# Altium PCB Dragonflyte.PcbDoc (part 3 of 3)
Units mil, origin at the board's own origin, x right, y up, seen from the top; angles counter-clockwise.
Board outline 1814.93 x 2125 mil, 6 copper layers (Component Side, Ground Plane (GND), Inner Layer 1, Inner Layer 2, Power Plane (VCC), Solder Side), stack 62.6 mil thick; 147 components, 158 nets, 1045 pads, 352 vias.
Unrouted connection lines stored in the file: 306.
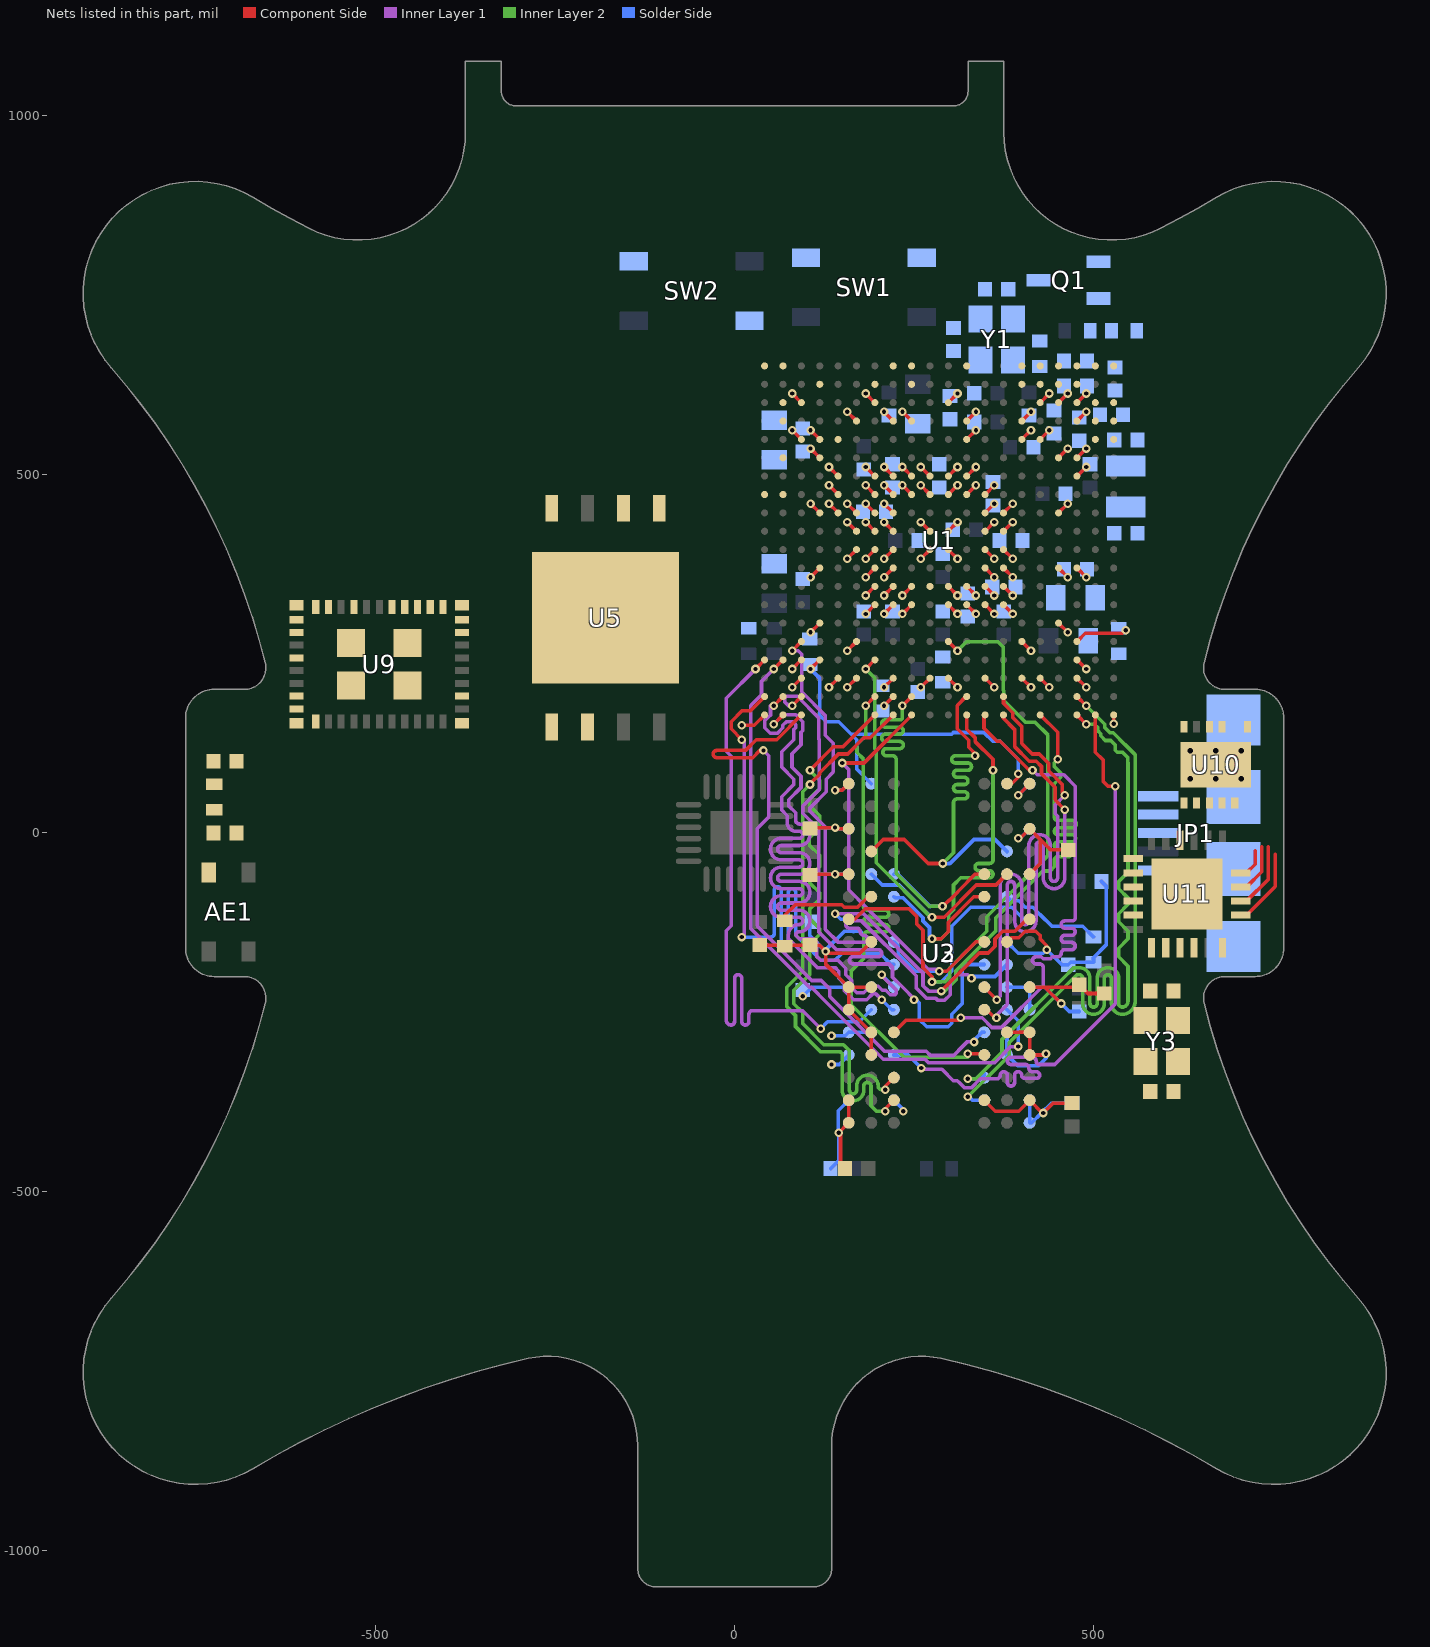
[diagram p7: the nets of this part, all layers, seen from the top]

## Via types
v1: diameter 12, hole 6, Component Side to Solder Side, tented both sides, 330 vias
v2: diameter 19.68, hole 7.87, Component Side to Solder Side, 12 vias
v3: diameter 12, hole 6, Component Side to Solder Side, 5 vias
v4: diameter 19.68, hole 11.81, Component Side to Solder Side, 5 vias

## Nets (pads, with @x,y where several pads share a name; then routed paths per layer and width w, separated by ;. In a path a pad name is that pad's centre, name@x,y a point inside that pad or via, vN(x,y) a via of type N, cw(c..) or ccw(c..) an arc to the next point about the centre after c; other vN are vias at no path point) (continued)
DRAM_D27: U1.C2 U3.H7 | length 884.8
  Component Side w5: v1(80.1,177.18) U1.C2@92.89,189.98
  Inner Layer 1 w5: v1@79.82,177.5 74.82,177.5 69.82,182.5 69.82,187.5 72.6,190.27 87.05,190.27 117.32,160 117.32,130.36 117.5,130.18 117.5,60.18 94.82,37.5 94.82,27.5 117.32,5 117.32,-138.08 141.74,-162.5 199.82,-162.5 cw(c199.82,-167.5) 204.82,-167.5 cw(c199.82,-167.5) 199.82,-172.5 164.82,-172.5 ccw(c164.82,-177.5) 159.82,-177.5 ccw(c164.82,-177.5) 164.82,-182.5 214.82,-182.5 219.82,-187.5 219.82,-200.99 235.29,-216.45 235.55,-216.45 249.82,-230.72 v1(249.82,-232.5)
  Solder Side w5: v1(249.82,-232.5) 252.5,-232.5 257.32,-237.32 257.32,-260 267.32,-270 297.32,-270 302.32,-265 302.32,-252.32 317.05,-237.6 317.05,-190.28 324.07,-183.25 U3.H7@347.81,-183.25
DRAM_D28: U1.A2 U3.H3 | length 896.7
  Component Side w5: v1(10,130) -5,145 -5,155 10,170 21.73,170 U1.A2@41.71,189.98
  Inner Layer 1 w5: v1(10,-145) 13.32,-141.68 13.32,126.68 v1(10,130)
  Solder Side w5: v1(10,-145) 50,-145 ccw(c50,-140) 55,-140 55,-80 cw(c60,-80) 60,-75 cw(c60,-79.82) 64.82,-79.82 64.82,-156 ccw(c69.82,-156) 69.82,-161 ccw(c69.82,-156) 74.82,-156 74.82,-82.5 cw(c79.82,-82.5) 79.82,-77.5 cw(c79.82,-82.5) 84.82,-82.5 84.82,-142.5 119.82,-177.5 139.82,-177.5 149.82,-167.5 202.09,-167.5 217.84,-183.25 U3.H3@221.83,-183.25
DRAM_D29: U1.C5 U3.H8 | length 886
  Component Side w5: v1(80.1,253.96) U1.C5@92.89,266.75
  Inner Layer 1 w5: v1(80.1,253.96) 88.37,253.96 93.19,249.13 93.19,196.86 126.32,163.73 126.32,136 137.32,125 137.32,85 127.32,75 127.32,57.27 104.82,34.77 104.82,30.23 126.32,8.73 126.32,-134.35 144.47,-152.5 179.82,-152.5 ccw(c179.82,-147.5) 184.82,-147.5 ccw(c179.82,-147.5) 179.82,-142.5 cw(c179.82,-137.5) 174.82,-137.5 ccw(c169.82,-137.5) 169.82,-132.5 159.82,-132.5 cw(c159.82,-127.5) 154.82,-127.5 cw(c159.82,-127.5) 159.82,-122.5 176.69,-122.5 244.32,-190.13 252.96,-198.78 252.96,-216.05 266.92,-230 279.64,-230 282.37,-232.73 292.73,-232.73 300.05,-225.41 300.05,-207.27 309.82,-197.5 324.82,-197.5 v1(329.82,-202.5)
  Solder Side w5: v1(329.82,-202.5) 332.35,-199.98 362.58,-199.98 U3.H8@379.31,-183.25
DRAM_D30: U1.B4 U3.F8 | length 909.9
  Component Side w5: v1(54.51,228.37) U1.B4@67.3,241.16
  Inner Layer 1 w5: v1(54.51,228.37) 37.32,211.18 37.32,192.32 22.5,177.5 22.5,10.23 22.32,10.05 22.32,-133.18 104.14,-215 106.86,-215 126.86,-235 206.87,-315 265,-315 270,-320 362.14,-320 384.64,-297.5 v1(394.82,-297.5)
  Solder Side w5: U3.F8@379.31,-246.24 394.82,-261.75 v1(394.82,-297.5)
DRAM_D31: U1.A4 U3.F2 | length 904.4
  Component Side w5: v1(28.92,228.37) U1.A4@41.71,241.16
  Inner Layer 1 w5: 0,-249.32 -0.18,-249.5 ; v1(28.92,228.37) -11.68,187.77 -11.68,113.95 -4.68,106.95 -4.68,-129.27 -11.68,-136.27 -11.68,-261 ccw(c-5.18,-261) -5.18,-267.5 ccw(c-5.18,-262.5) -0.18,-262.5 -0.18,-249.5 ; v1(119.82,-272.5) 94.82,-247.5 24.82,-247.5 ccw(c24.82,-252.5) 19.82,-252.5 19.82,-262.5 cw(c14.82,-262.5) 14.82,-267.5 cw(c14.82,-262.5) 9.82,-262.5 9.82,-202.5 ccw(c4.82,-202.5) 4.82,-197.5 ccw(c4.82,-202.5) 0,-201.18 ccw(c4.82,-202.5) -0.18,-202.5 -0.18,-249.5
  Solder Side w5: v1(119.82,-272.5) 129.35,-262.97 173.61,-262.97 U3.F2@190.33,-246.24
DRAM_DQM0: U1.N1 U2.E7 | length 829.4
  Component Side w5: U2.E7@221.83,-277.74 238.57,-261 311.32,-261 v1(314.82,-257.5) ; U1.N1@348.8,164.39 347.32,164.39 347.32,145.86 365.39,127.79 369.88,127.79 410.18,87.5 v1(414.82,87.5)
  Inner Layer 1 w5: v1(314.82,-257.5) 344.66,-257.5 358.16,-271 371.76,-271 429.82,-212.93 429.82,-187.5 ccw(c424.82,-187.5) 424.82,-182.5 419.82,-182.5 cw(c419.82,-177.5) 414.82,-177.5 cw(c419.82,-177.5) 419.82,-172.5 427.14,-172.5 429.64,-175 440,-175 442.5,-172.5 449.82,-172.5 ccw(c449.82,-167.5) 454.82,-167.5 cw(c459.82,-167.5) 459.82,-162.5 469.32,-162.5 ccw(c469.32,-157.5) 474.32,-157.5 ccw(c469.32,-157.5) 469.32,-152.5 459.82,-152.5 cw(c459.82,-147.5) 454.82,-147.5 cw(c459.82,-147.5) 459.82,-142.5 469.32,-142.5 ccw(c469.32,-137.5) 474.32,-137.5 ccw(c469.32,-137.5) 469.32,-132.5 459.82,-132.5 cw(c459.82,-127.5) 454.82,-127.5 cw(c459.82,-127.5) 459.82,-122.5 469.82,-122.5 ccw(c469.82,-118) 474.32,-118 474.32,65.27 458.59,81 421.32,81 v1(414.82,87.5)
DRAM_DQM1: U1.G2 U2.D3 | length 804.6
  Component Side w5: v1(182.46,177.18) U1.G2@195.26,189.98 ; v1(324.82,-307.5) 345,-307.5 U2.D3@346.73,-309.23 ; U2.D3@342.46,-309.23 U2.D3@346.73,-309.23 ; U2.D3@347.81,-309.23 U2.D3@346.73,-309.23 ; U2.D3@349.82,-312.32 U2.D3@346.73,-309.23
  Inner Layer 2 w5: v1(182.46,177.18) 182.46,135.18 169.96,122.68 169.96,112.32 179.32,102.96 179.32,-102 ccw(c184.82,-102) 184.82,-107.5 209.82,-107.5 cw(c209.82,-112.5) 214.82,-112.5 cw(c209.82,-112.5) 209.82,-117.5 184.82,-117.5 ccw(c184.82,-122.5) 179.82,-122.5 ccw(c184.82,-122.5) 184.82,-127.5 209.82,-127.5 cw(c209.82,-132.5) 214.82,-132.5 cw(c209.82,-132.5) 209.82,-137.5 184.82,-137.5 ccw(c184.82,-142.5) 179.82,-142.5 179.82,-175.32 179.32,-175.32 162.32,-192.32 162.32,-239.09 235.73,-312.5 324.82,-312.5 v1@324.82,-310 ; v1(324.82,-307.5) v1@324.82,-310 ; v1@325,-310.18 v1@324.82,-310
DRAM_DQM2: U1.W1 U3.D3 | length 941.3
  Component Side w5: U1.W1@502.34,164.39 502.34,112.66 513.35,101.65 513.35,96.43 ; 513.32,86.59 513.32,96.41 ; 513.35,86.57 513.35,71.65 520,65 v1(530,65)
  Inner Layer 1 w5: v1(259.82,-327.5) 261.32,-329 288.64,-329 304.64,-345 310,-345 312.32,-347.32 319.64,-354.64 330,-354.64 342.15,-342.5 364.82,-342.5 ccw(c364.82,-337.5) 369.82,-337.5 cw(c374.82,-337.5) 374.82,-332.5 cw(c374.82,-337.5) 379.82,-337.5 379.82,-347.5 ccw(c384.82,-347.5) 384.82,-352.5 ccw(c384.82,-347.5) 389.82,-347.5 389.82,-337.5 cw(c394.82,-337.5) 394.82,-332.5 cw(c394.82,-337.5) 399.82,-337.5 ccw(c403.82,-337.5) 403.82,-341.5 420.82,-341.5 ccw(c420.82,-337.5) 424.82,-337.5 ccw(c419.82,-337.5) 419.82,-332.5 414.82,-332.5 cw(c414.82,-327.5) 409.82,-327.5 ccw(c404.82,-327.5) 404.82,-322.5 384.82,-322.5 cw(c384.82,-317.5) 379.82,-317.5 cw(c384.82,-317.5) 384.82,-312.5 414.82,-312.5 cw(c414.82,-317.5) 419.82,-317.5 ccw(c424.82,-317.5) 424.82,-322.5 445.66,-322.5 530,-238.16 v1(530,65)
  Solder Side w5: U3.D3@221.83,-309.23 241.55,-309.23 v1(259.82,-327.5)
DRAM_DQM3: U1.C1 U3.E7 | length 894.5
  Component Side w5: v1(40,115) 35,115 25,105 -25,105 cw(c-25,110) -30,110 cw(c-25,110) -25,115 15,115 30,130 58.5,130 U1.C1@92.89,164.39 ; U1.C1@92.89,165 U1.C1@92.89,164.39 ; U1.C1@93.46,163.82 U1.C1@92.89,164.39
  Inner Layer 1 w5: v1(40,115) 47.5,107.5 47.5,69.82 47.32,69.64 47.32,22.32 31.32,6.32 31.32,-129.46 107.37,-205.5 120.5,-205.5 132.32,-217.32 132.32,-227.68 208.59,-304 266.73,-304 272.73,-310 305,-310 312.32,-302.68 312.32,-302.32 323.55,-291.1 v1(333.42,-291.1)
  Solder Side w5: v1(333.42,-291.1) 331.1,-291.1 344.46,-277.74 U3.E7@347.81,-277.74
DRAM_DQS0_N: U1.P2 U2.G3 | length 813.4
  Component Side w5: U2.G3@347.81,-214.74 347.44,-215.12 v1(364.82,-232.5) ; U1.P2@374.39,189.98 374.39,180.54 387.32,167.61 387.32,160.9 399.82,148.4 399.82,124.73 414.55,110 424.14,110 437.32,96.82 437.32,86.46 456.32,67.46 456.32,56 v1(459.82,52.5)
  Inner Layer 1 w5: v1(364.82,-232.5) 369.82,-227.5 369.82,-72.5 cw(c384.82,-72.5) 384.82,-57.5 cw(c384.82,-72.5) 399.82,-72.5 399.82,-122.5 ccw(c404.82,-122.5) 404.82,-127.5 ccw(c404.82,-122.5) 409.82,-122.5 409.82,-17.5 cw(c424.82,-17.5) 424.82,-2.5 cw(c424.82,-17.5) 439.82,-17.5 439.82,-62.5 ccw(c444.82,-62.5) 444.82,-67.5 ccw(c444.82,-62.5) 449.82,-62.5 449.82,23.41 446.32,26.91 446.32,39 v1(459.82,52.5)
DRAM_DQS0_P: U1.P1 U2.F3 | length 808.7
  Component Side w5: U2.F3@347.81,-246.24 351.08,-246.24 362.34,-257.5 v1(364.74,-257.5) ; U1.P1@374.39,164.39 374.39,159.69 389.82,144.25 389.82,120.58 410.41,100 420,100 427.32,92.68 427.32,82.32 446.32,63.32 446.32,46 v1(459.82,32.5)
  Inner Layer 1 w5: v1(364.74,-257.5) 365.54,-257.5 363.34,-255.3 379.82,-238.82 379.82,-72.5 cw(c384.82,-72.5) 384.82,-67.5 cw(c384.82,-72.5) 389.82,-72.5 389.82,-122.5 ccw(c404.82,-122.5) 404.82,-137.5 ccw(c404.82,-122.5) 419.82,-122.5 419.82,-17.5 cw(c424.82,-17.5) 424.82,-12.5 cw(c424.82,-17.5) 429.82,-17.5 429.82,-62.5 ccw(c444.82,-62.5) 444.82,-77.5 ccw(c444.82,-62.5) 459.82,-62.5 v1(459.82,32.5)
DRAM_DQS1_N: U1.H1 U2.B7 | length 788.6
  Component Side w5: v1(104.82,67.5) 104.82,69.5 105.91,69.5 118.32,81.91 118.32,83.68 144.64,110 157.28,110 179.78,132.5 188.96,132.5 U1.H1@220.85,164.39 ; v1(209.82,-387.5) 209.82,-384.23 U2.B7@221.83,-372.22
  Inner Layer 2 w5: v1@107.3,65.03 v1(104.82,67.5) 94.82,57.5 94.82,-192.55 72.32,-215.05 72.32,-241.82 84.64,-254.14 84.64,-269.64 120,-305 147.32,-305 149.82,-307.5 149.82,-358.31 ccw(c164.82,-358.31) 164.82,-373.31 ccw(c164.82,-358.31) 179.82,-358.31 179.82,-352.5 cw(c184.82,-352.5) 184.82,-347.5 cw(c184.82,-352.5) 189.82,-352.5 189.82,-379.82 197.5,-387.5 v1(209.82,-387.5)
DRAM_DQS1_P: U1.G1 U2.C7 | length 785.4
  Component Side w5: v1(104.82,87.5) 137.32,120 150.87,120 U1.G1@195.26,164.39 ; v1(209.82,-357.5) 209.82,-352.74 U2.C7@221.83,-340.73
  Inner Layer 2 w5: v1(104.82,87.5) 104.82,86.59 118.32,73.09 118.32,61.91 104.82,48.41 104.82,37.5 118.32,24 118.32,6.86 103.96,-7.5 103.96,-16.64 118.32,-31 118.32,-46.64 104.82,-60.14 104.82,-69.82 118.32,-83.32 118.32,-91.68 104.82,-105.18 104.82,-119.82 118.32,-133.32 118.32,-141.27 104.82,-154.77 104.82,-196.69 82.32,-219.19 82.32,-237.68 94.64,-250 94.64,-265.5 124.14,-295 151.46,-295 159.82,-303.36 159.82,-358.31 ccw(c164.82,-358.31) 164.82,-363.31 ccw(c164.82,-358.31) 169.82,-358.31 169.82,-352.5 cw(c184.82,-352.5) 184.82,-337.5 cw(c184.82,-352.5) 199.82,-352.5 ccw(c204.82,-352.5) 204.82,-357.5 v1(209.82,-357.5)
DRAM_DQS2_N: U1.V2 U3.B7 | length 953
  Component Side w5: U1.V2@476.75,189.98 v1(489.55,177.18)
  Inner Layer 2 w5: v1(324.82,-367.5) 382.32,-310 382.32,-291.87 395.62,-278.58 463.26,-210.94 476.69,-197.5 ; 475.76,-198.43 476.69,-197.5 ; v1(489.55,177.18) 515.43,151.3 515.43,146.89 522.76,139.57 527.16,139.57 544.23,122.5 544.32,122.5 557.5,109.32 557.5,109.23 557.82,108.91 557.82,-234.5 cw(c539.82,-234.5) 539.82,-252.5 cw(c539.82,-237.5) 524.82,-237.5 524.82,-202.5 ccw(c519.82,-202.5) 519.82,-197.5 ccw(c519.82,-202.5) 514.82,-202.5 514.82,-237.5 cw(c499.82,-237.5) 499.82,-252.5 cw(c499.82,-237.5) 484.82,-237.5 484.82,-202.5 ccw(c479.82,-202.5) 479.82,-197.5 476.69,-197.5
  Solder Side w5: v1(324.82,-367.5) 324.82,-365.77 331.28,-372.22 U3.B7@347.81,-372.22
DRAM_DQS2_P: U1.V1 U3.C7 | length 949.1
  Component Side w5: U1.V1@476.75,164.39 v1(489.55,151.59)
  Inner Layer 2 w5: v1(324.82,-342.14) 336.04,-342.14 372.32,-305.86 372.32,-287.73 385.62,-274.44 456.19,-203.86 472.55,-187.5 479.82,-187.5 cw(c479.82,-202.5) 494.82,-202.5 494.82,-237.5 ccw(c499.82,-237.5) 499.82,-242.5 ccw(c499.82,-237.5) 504.82,-237.5 504.82,-202.5 cw(c519.82,-202.5) 519.82,-187.5 cw(c519.82,-202.5) 534.82,-202.5 534.82,-237.5 ccw(c539.82,-237.5) 539.82,-242.5 ccw(c539.82,-234.5) 547.82,-234.5 547.82,-185.5 534.82,-172.5 534.82,-160.5 547.82,-147.5 547.82,-136.75 534.82,-123.75 534.82,-112.5 547.82,-99.5 547.82,-90.5 534.82,-77.5 534.82,-67.5 547.82,-54.5 547.82,97.5 547.5,97.82 547.5,105.18 540.18,112.5 532.82,112.5 529.96,115.37 529.96,122.63 523.73,128.86 516.19,128.86 509.82,135.23 509.82,138.36 505.43,142.75 505.43,147.16 501,151.59 v1(489.55,151.59)
  Solder Side w5: v1(324.82,-342.14) 340.74,-342.14 347.81,-335.07 U3.C7@347.81,-340.73
DRAM_DQS3_N: U1.B1 U3.G3 | length 892.9
  Component Side w5: v1(54.51,151.59) U1.B1@67.3,164.39
  Inner Layer 1 w5: v1(54.51,151.59) 67.6,164.68 85.27,164.68 94.82,155.14 94.82,142.5 92.32,140 92.32,122.93 79.82,110.43 79.82,91.64 92.32,79.14 92.32,63.36 75.32,46.36 75.32,37.5 84.82,28 84.82,17.79 ccw(c89.82,17.79) 89.82,12.79 ; 89.82,12.5 cw(c89.82,-2.5) 104.82,-2.5 cw(c89.82,-2.5) 89.82,-17.5 64.82,-17.5 ccw(c64.82,-22.5) 59.82,-22.5 ccw(c64.82,-22.5) 64.82,-27.5 89.82,-27.5 cw(c89.82,-42.5) 104.82,-42.5 cw(c89.82,-42.5) 89.82,-57.5 64.82,-57.5 ccw(c64.82,-62.5) 59.82,-62.5 ccw(c64.82,-62.5) 64.82,-67.5 89.82,-67.5 cw(c89.82,-82.5) 104.82,-82.5 cw(c89.82,-82.5) 89.82,-97.5 64.82,-97.5 ccw(c64.82,-102.5) 59.82,-102.5 ccw(c64.82,-102.5) 64.82,-107.5 89.82,-107.5 cw(c89.82,-122.5) 104.82,-122.5 cw(c89.82,-122.5) 89.82,-137.5 ccw(c89.82,-142.5) 84.82,-142.5 89.82,-147.5 109.82,-147.5 114.07,-151.74 114.07,-171.74 119.82,-177.5 143.96,-177.5 154.82,-188.36 154.82,-197.5 159.82,-202.5 162.75,-205.43 162.75,-215.43 169.82,-222.5 179.82,-222.5 188.61,-213.71 200.18,-213.71 205.46,-219 210.41,-219 216.87,-225.45 221.87,-225.45 ccw(c221.87,-222.5) 224.82,-222.5 224.82,-218.72 204.96,-198.85 204.96,-197.36 v1(204.82,-197.5)
  Solder Side w5: v1(204.82,-197.5) 204.82,-197.74 U3.G3@221.83,-214.74
DRAM_DQS3_P: U1.B2 U3.F3 | length 887.8
  Component Side w5: v1(54.51,177.18) U1.B2@67.3,189.98
  Inner Layer 1 w5: v1(54.51,177.18) 49.73,177.18 49.89,177.02 49.89,164.09 49.33,164.09 42.01,156.77 42.01,146.42 49.33,139.09 59.68,139.09 67.01,146.42 67.01,149.95 71.74,154.68 81.13,154.68 84.82,150.99 84.82,146.64 82.32,144.14 82.32,130 65.5,113.18 65.5,91.82 82.32,75 82.32,67.5 65.32,50.5 65.32,32 73.29,24.04 73.29,14.04 ccw(c84.82,14.04) 84.82,2.5 89.82,2.5 cw(c89.82,-2.5) 94.82,-2.5 cw(c89.82,-2.5) 89.82,-7.5 64.82,-7.5 ccw(c64.82,-22.5) 49.82,-22.5 ccw(c64.82,-22.5) 64.82,-37.5 89.82,-37.5 cw(c89.82,-42.5) 94.82,-42.5 cw(c89.82,-42.5) 89.82,-47.5 64.82,-47.5 ccw(c64.82,-62.5) 49.82,-62.5 ccw(c64.82,-62.5) 64.82,-77.5 89.82,-77.5 cw(c89.82,-82.5) 94.82,-82.5 cw(c89.82,-82.5) 89.82,-87.5 64.82,-87.5 ccw(c64.82,-102.5) 49.82,-102.5 ccw(c64.82,-102.5) 64.82,-117.5 89.82,-117.5 cw(c89.82,-122.5) 94.82,-122.5 cw(c89.82,-122.5) 89.82,-127.5 ccw(c89.82,-142.5) 74.82,-142.5 74.82,-147.5 114.82,-187.5 139.82,-187.5 144.82,-192.5 144.82,-202.5 152.75,-210.43 152.75,-219.57 165.68,-232.5 183.96,-232.5 192.75,-223.71 196.04,-223.71 v1(204.82,-232.5)
  Solder Side w5: v1(204.82,-232.5) 218.56,-246.24 U3.F3@221.83,-246.24
DRAM_RAS: U1.J1 U2.J3 U3.J3 | length 644
  Component Side w5: v1(149.82,97.5) 180.14,97.5 246.44,163.8 U1.J1@246.44,164.39 ; v1(284.82,-192.5) 295.23,-192.5 335.98,-151.75 U2.J3@347.81,-151.75
  Inner Layer 1 w5: v1(149.82,97.5) 158.84,88.48 158.84,-79.19 184.14,-104.5 262.32,-182.68 269.64,-190 282.32,-190 v1(284.82,-192.5)
  Solder Side w5: U3.J3@221.83,-151.75 227.6,-157.52 227.6,-168.13 251.97,-192.5 v1(284.82,-192.5)
DRAM_RESET: R9.2 U1.D4 U2.T2 U3.T2 | length 516.4
  Component Side w5: v1(105.69,228.37) U1.D4@118.48,241.16 ; U2.T2@379.31,68.72 386.04,68.72 394.82,77.5 v1(394.82,82.5)
  Solder Side w5: v1(105.69,228.37) 118.19,215.87 118.19,164.13 127.32,155 145,155 162.5,137.5 ; U3.T2@190.33,68.72 169.96,89.1 169.96,130.04 162.5,137.5 ; v1(394.82,82.5) 394.82,102.86 370,127.68 359.64,127.68 347.32,140 304.64,140 302.14,137.5 162.5,137.5
DRAM_SDBA0: U1.G4 U2.M2 U3.M2 | length 644.5
  Component Side w5: v1(182.46,228.37) U1.G4@195.26,241.16 ; v1(274.82,-117.5) 291.69,-117.5 336.69,-72.5 364.07,-72.5 U2.M2@379.31,-57.26
  Inner Layer 2 w5: v1(182.46,228.37) 194.96,215.87 194.96,117.73 197.32,115.37 197.32,-41.62 274.01,-118.31 v1(274.82,-117.5)
  Solder Side w5: U3.M2@190.33,-57.26 205.57,-72.5 229.42,-72.5 271.32,-114.41 271.32,-117.37 271.45,-117.5 v1(274.82,-117.5)
DRAM_SDBA1: U1.M2 U2.N8 U3.N8 | length 626.6
  Component Side w5: U2.N8@190.33,-25.77 207.06,-9.04 236.36,-9.04 269.82,-42.5 v1(289.82,-42.5) ; U1.M2@323.21,189.98 322.3,189.98 309.82,177.5 309.82,145.18 325.82,129.18 325.82,119.23 337.55,107.5 v1(334.82,107.5)
  Inner Layer 2 w5: v1(289.82,-42.5) 304.82,-27.5 304.82,42.5 cw(c309.82,42.5) 309.82,47.5 319.82,47.5 ccw(c319.82,52.5) 324.82,52.5 ccw(c319.82,52.5) 319.82,57.5 309.82,57.5 cw(c309.82,62.5) 304.82,62.5 cw(c309.82,62.5) 309.82,67.5 319.82,67.5 ccw(c319.82,72.5) 324.82,72.5 ccw(c319.82,72.5) 319.82,77.5 309.82,77.5 cw(c309.82,82.5) 304.82,82.5 cw(c309.82,82.5) 309.82,87.5 324.82,87.5 ccw(c324.82,92.5) 329.82,92.5 ccw(c324.82,92.5) 324.82,97.5 307.32,97.5 cw(c307.32,102.5) 302.32,102.5 cw(c307.32,102.5) 307.32,107.5 v1(334.82,107.5)
  Solder Side w5: v1(289.82,-42.5) 299.82,-42.5 333.28,-9.04 362.58,-9.04 U3.N8@379.31,-25.77
DRAM_SDBA2: U1.J2 U2.M3 U3.M3 | length 639.8
  Component Side w5: v1(233.64,177.18) U1.J2@246.44,189.98 ; v1(289.42,-102.09) 290.23,-102.09 298.32,-94 298.73,-94 311.32,-81.41 311.32,-81 335.06,-57.26 U2.M3@347.81,-57.26
  Inner Layer 2 w5: v1(233.64,177.18) 233.64,161.32 cw(c229.82,161.32) 229.82,157.5 209.82,157.5 ccw(c209.82,152.5) 204.82,152.5 ccw(c209.82,152.5) 209.82,147.5 229.82,147.5 cw(c229.82,142.5) 234.82,142.5 cw(c229.82,142.5) 229.82,137.5 209.82,137.5 ccw(c209.82,132.5) 204.82,132.5 ccw(c209.82,132.5) 209.82,127.5 229.82,127.5 cw(c229.82,122.5) 234.82,122.5 cw(c229.82,122.5) 229.82,117.5 211.32,117.5 ccw(c211.32,112.5) 206.32,112.5 ccw(c211.32,112.5) 211.32,107.5 219.82,107.5 cw(c219.82,102.5) 224.82,102.5 224.82,-56.39 270.93,-102.5 271.33,-102.09 v1(289.42,-102.09)
  Solder Side w5: U3.M3@221.83,-57.26 226.91,-57.26 272.14,-102.5 272.55,-102.09 v1(289.42,-102.09)
DRAM_SDCKE: R8.2 U1.L5 U2.K9 U3.K9 | length 1095.4
  Component Side w5: U2.K9@158.84,-120.26 167.07,-120.26 181.83,-105.49 242.81,-105.49 253.32,-116 253.32,-126.41 262.32,-135.41 262.32,-187.68 274.82,-200.18 v1(274.82,-207.5) ; U1.L5@297.62,266.75 v1(310.41,253.96)
  Inner Layer 2 w5: v1(274.82,-207.5) 292.5,-207.5 299.32,-200.68 299.32,-188.41 351.05,-136.68 351.05,-116.68 436.32,-31.41 436.32,136.41 418.73,154 405.55,154 374.69,184.87 374.69,198.04 374.09,198.63 374.09,259.13 366.77,266.46 322.91,266.46 v1(310.41,253.96)
  Solder Side w5: v1(274.82,-207.5) 287.5,-207.5 302.32,-192.68 302.32,-130 328.79,-103.53 385.85,-103.53 402.58,-120.26 U3.K9@410.81,-120.26
DRAM_SDODT: U1.T1 U2.K1 U3.K1 | length 1022.7
  Component Side w5: v1(287.55,-220.23) 340.53,-167.24 353.21,-167.24 362.58,-157.87 362.58,-147.6 373.19,-136.98 390.34,-136.98 407.07,-120.26 U2.K1@410.81,-120.26 ; U1.T1@425.57,164.39 449.82,140.14 v1(449.82,102.5)
  Inner Layer 1 w5: v1(139.82,-112.5) 179.42,-112.5 180.42,-113.5 253.32,-186.41 262.32,-195.41 262.32,-212.68 269.87,-220.23 v1(287.55,-220.23)
  Inner Layer 2 w5: v1(287.55,-220.23) 287.96,-220.23 290.23,-222.5 308.32,-204.41 308.32,-192.13 363.82,-136.63 363.82,-118.5 429.32,-53 439.32,-53 445.32,-47 445.32,-37.5 cw(c449.69,-37.5) 449.69,-33.13 464.19,-33.13 ccw(c464.19,-27.5) 469.82,-27.5 ccw(c464.82,-27.5) 464.82,-22.5 449.82,-22.5 cw(c449.82,-18) 445.32,-18 445.32,-17.5 cw(c450.32,-17.5) 450.32,-12.5 469.82,-12.5 ccw(c469.82,-7.5) 474.82,-7.5 ccw(c469.82,-7.5) 469.82,-2.5 450.32,-2.5 cw(c450.32,2.5) 445.32,2.5 cw(c450.32,2.5) 450.32,7.5 470.82,7.5 ccw(c470.82,12.5) 475.82,12.5 ccw(c470.82,12.5) 470.82,17.5 449.82,17.5 cw(c449.82,22) 445.32,22 445.32,68.5 454.32,77.5 454.32,83.5 445.32,92.5 445.32,98 v1(449.82,102.5)
  Solder Side w5: v1(139.82,-112.5) 147.58,-120.26 U3.K1@158.84,-120.26 ; v1(287.55,-220.23) 287.96,-220.23 v1@290.23,-222.5
DRAM_WE: U1.M1 U2.L3 U3.L3 | length 627.5
  Component Side w5: v1(274.82,-147.5) 287.5,-147.5 297.32,-137.68 297.32,-124.59 333.16,-88.76 U2.L3@347.81,-88.76 ; U1.M1@323.21,164.39 323.21,144.52 334.82,132.91 334.82,127.5 359.82,102.5 v1(359.82,87.5)
  Inner Layer 2 w5: v1(274.82,-147.5) 287.5,-147.5 298.32,-136.68 298.32,-113.59 304.82,-107.09 304.82,-72.5 314.82,-62.5 354.82,-62.5 ccw(c354.82,-57.5) 359.82,-57.5 ccw(c354.82,-57.5) 354.82,-52.5 339.82,-52.5 cw(c339.82,-47.5) 334.82,-47.5 cw(c339.82,-47.5) 339.82,-42.5 354.82,-42.5 ccw(c354.82,-37.5) 359.82,-37.5 v1(359.82,87.5)
  Solder Side w5: U3.L3@221.83,-88.76 223.41,-90.34 234.53,-90.34 262.32,-118.13 262.32,-122.68 271.32,-131.68 271.32,-144 v1(274.82,-147.5)
GND: C1.1 C2.1 C3.1 C4.1 C5.1 C6.1 C7.1 C8.1 C9.1 C10.1 C11.1 C12.1 C13.1 C14.1 C15.1 C16.1 C17.1 C18.1 C19.1 C20.1 C21.1 C22.1 C23.1 C24.1 C25.1 C26.1 C27.1 C28.1 C29.1 C30.1 C31.1 C32.1 C33.1 C34.1 C35.1 C36.1 C37.1 C38.1 C39.1 C40.1 C41.1 C42.1 C43.1 C44.1 C45.1 C46.1 C47.1 C48.1 C49.1 C50.1 C51.1 C52.1 C53.1 C54.1 C55.1 C56.1 C57.1 C58.1 C59.1 C60.1 C61.1 C62.1 C63.1 C64.1 C65.2 C66.1 C67.1 C68.1 C69.1 C70.1 C71.1 C72.1 C73.1 C74.2 C75.2 C76.1 C77.2 C78.2 C79.1 C80.1 C81.1 C82.1 C83.1 C84.1 C85.1 C86.1 C87.1 JP1.GND JP1.MT1 JP1.MT2 JP1.P$1 JP1.P$2 Q1.2 R3.1 R6.1 R7.2 R8.1 R9.1 R11.1 R12.1 R13.2 R24.1 R25.1 R28.1 R31.1 R32.1 R33.1 R34.1 SW2.3 U1.A1 U1.A20 U1.C3 U1.C4 U1.C18 U1.D6 U1.D9 U1.D12 U1.D15 U1.E3 U1.F3 U1.F5 U1.F17 U1.G7 U1.G8 U1.G9 U1.G10 U1.G11 U1.G12 U1.G13 U1.G14 U1.G18 U1.G19 U1.H3 U1.H7 U1.H14 U1.H17 U1.H20 U1.J7 U1.J14 U1.J17 U1.J19 U1.J20 U1.K3 U1.K10 U1.K11 U1.K14 U1.L3 U1.L7 U1.L10 U1.L11 U1.L14 U1.M7 U1.M14 U1.M16 U1.M17 U1.M20 U1.N3 U1.N7 U1.N13 U1.P7 U1.P8 U1.P9 U1.P10 U1.P11 U1.P12 U1.R3 U1.R5 U1.R17 U1.R19 U1.R20 U1.T3 U1.T16 U1.U6 U1.U9 U1.U12 U1.U15 U1.U19 U1.U20 U1.V3 U1.V4 U1.V14 U1.V15 U1.V18 U1.W18 U1.Y1 U1.Y18 U1.Y20 U2.A9 U2.B1 U2.B3 U2.B9 U2.D1 U2.D8 U2.E1 U2.E2 U2.E8 U2.F9 U2.G1 U2.G8 U2.G9 U2.J2 U2.J8 U2.M1 U2.M9 U2.P1 U2.P9 U2.T1 U2.T9 U3.A9 U3.B1 U3.B3 U3.B9 U3.D1 U3.D8 U3.E1 U3.E2 U3.E8 U3.F9 U3.G1 U3.G8 U3.G9 U3.J2 U3.J8 U3.M1 U3.M9 U3.P1 U3.P9 U3.T1 U3.T9 U4.5 U4.7@3865,-1010 U5.4 U5.9 U6.2 U6.6 U6.7@7240,495 U7.5 U7.11 U8.6 U8.7 U8.8 U8.15 U8.16 U8.17@4745,385 U9.1 U9.12 U9.14 U9.19 U9.21 U9.29 U9.32 U9.33 U9.35 U9.37 U9.40 U9.42 U9.43 U10.5 U10.13 U11.25 Y1.2 Y3.2 | length 3693.4
  Component Side w5: v3(10,150) 27.32,150 U1.A1@41.71,164.39 ; C12.1@35,-156.14 68.43,-156.14 R7.2@70,-157.72 ; R7.2@75.75,-156.14 C9.1@105,-156.14 117.71,-156.14 v1(126.57,-165) ; v1(80.1,202.77) U1.C3@92.89,215.57 ; v1(80.1,228.37) U1.C4@92.89,241.16 ; v1(80.1,612.23) U1.C18@92.89,599.43 ; C8.1@104.82,-58.64 106.2,-57.26 v1@140.06,-57.26 ; C7.1@104.82,6.36 105.96,7.5 v1(139.82,7.5) 141.59,5.73 U2.P9@158.84,5.73 ; v1(105.69,279.55) U1.D6@118.48,292.34 ; v1(105.69,356.32) U1.D9@118.48,369.11 ; v1(105.69,458.68) U1.D12@118.48,445.89 ; v1(105.69,535.45) U1.D15@118.48,522.66 ; v1(131.28,202.77) U1.E3@144.07,215.57 ; v1(139.82,-57.5) v1@140.06,-57.26 ; v1(139.82,59.37) 149.49,59.37 U2.T9@158.84,68.72 ; C10.1@153.68,-467.5 147.32,-461.14 147.32,-420 v1(144.82,-417.5) 158.6,-403.72 U2.A9@158.84,-403.72 U2.B9@158.84,-372.22 ; v1(156.87,202.77) U1.F3@169.66,215.57 ; v1(156.87,253.96) U1.F5@169.66,266.75 ; v1(156.87,586.63) U1.F17@169.66,573.84 ; U2.M9@158.84,-57.26 v1@140.06,-57.26 ; v1(182.46,305.14) U1.G7@195.26,317.93 ; v1(182.46,330.73) U1.G8@195.26,343.52 ; v1(182.46,356.32) U1.G9@195.26,369.11 ; v1(182.46,381.91) U1.G10@195.26,394.7 ; v1(182.46,433.09) U1.G11@195.26,420.3 ; v1(182.46,458.68) U1.G12@195.26,445.89 ; v1(182.46,484.27) U1.G13@195.26,471.48 ; v1(182.46,509.86) U1.G14@195.26,497.07 ; v1(182.46,612.23) U1.G18@195.26,599.43 ; U2.D8@190.33,-309.23 U2.E8@190.33,-277.74 U2.F9@158.84,-246.24 U2.G9@158.84,-214.74 ; U2.G8@190.33,-214.74 U2.G9@158.84,-214.74 ; U2.J8@190.33,-151.75 174.59,-167.5 129.07,-167.5 v1(126.57,-165) ; v1(208.05,202.77) U1.H3@220.85,215.57 ; v1(208.05,305.14) U1.H7@220.85,317.93 ; v1(208.05,509.86) U1.H14@220.85,497.07 ; v1(208.05,586.63) U1.H17@220.85,573.84 ; v1(233.64,305.14) U1.J7@246.44,317.93 ; v1(233.64,509.86) U1.J14@246.44,497.07 ; v1(233.64,586.63) U1.J17@246.44,573.84 ; v1(259.23,202.77) U1.K3@272.03,215.57 ; v1(259.23,381.91) U1.K10@272.03,394.7 ; v1(259.23,433.09) U1.K11@272.03,420.3 ; v1(259.23,509.86) U1.K14@272.03,497.07 ; U1.L3@297.62,215.57 v1(310.41,202.77) ; U1.L7@297.62,317.93 v1(310.41,305.14) ; U1.L10@297.62,394.7 v1(310.41,381.91) ; U1.L11@297.62,420.3 v1(310.41,433.09) ; U1.L14@297.62,497.07 v1(310.41,509.86) ; U1.M7@323.21,317.93 v1(336,305.14) ; U1.M14@323.21,497.07 v1(336,509.86) ; U1.M16@323.21,548.25 v1(336,561.04) ; U1.M17@323.21,573.84 v1(336,586.63) ; U2.B3@347.81,-372.22 363.09,-387.5 395.53,-387.5 U2.B1@410.81,-372.22 428.58,-390 v1(429.65,-390) 443.29,-376.36 C11.1@469.82,-376.36 ; U1.N3@348.8,215.57 v1(361.59,202.77) ; U1.N7@348.8,317.93 v1(361.59,305.14) ; U1.N13@348.8,471.48 v1(361.59,484.27) ; U1.P7@374.39,317.93 v1(387.19,305.14) ; U1.P8@374.39,343.52 v1(387.19,330.73) ; U1.P9@374.39,369.11 v1(387.19,356.32) ; U1.P10@374.39,394.7 v1(387.19,381.91) ; U1.P11@374.39,420.3 v1(387.19,433.09) ; U1.P12@374.39,445.89 v1(387.19,458.68) ; U2.E2@379.31,-277.74 U2.E1@410.81,-277.74 U2.D1@410.81,-309.23 431.91,-309.23 v1(433.64,-307.5) ; U2.J2@379.31,-151.75 385.08,-145.98 395.69,-145.98 404.69,-136.98 419.31,-136.98 424.82,-142.5 cw(c424.82,-143.25) 425.57,-143.25 425.57,-147.68 434.82,-156.93 v1(434.82,-162.5) ; v1(394.82,-7.5) 397.58,-7.5 U2.P1@410.81,5.73 425.57,-9.04 ; v1(394.82,52.5) 410.81,68.48 U2.T1@410.81,68.72 ; U1.R3@399.98,215.57 v1(412.78,202.77) ; U1.R5@399.98,266.75 v1(412.78,253.96) ; U1.R17@399.98,573.84 v1(412.78,586.63) ; U2.G1@410.81,-214.74 432.07,-214.74 ; U2.M1@410.81,-57.26 425.57,-42.5 425.57,-9.04 ; U1.T3@425.57,215.57 v1(438.37,202.77) ; U1.T16@425.57,548.25 v1(438.37,561.04) ; U1.U6@451.16,292.34 v1(463.96,279.55) ; U1.U9@451.16,369.11 v1(463.96,356.32) ; U1.U12@451.16,445.89 v1(463.96,458.68) ; U1.U15@451.16,522.66 v1(463.96,535.45) ; v1(454.82,-237.5) 432.07,-214.74 ; C85.1@464.82,-23.64 440.18,-23.64 425.57,-9.04 ; U1.V3@476.75,215.57 v1(489.55,202.77) ; U1.V4@476.75,241.16 v1(489.55,228.37) ; U1.V14@476.75,497.07 v1(489.55,509.86) ; U1.V15@476.75,522.66 v1(489.55,535.45) ; U1.V18@476.75,599.43 v1(489.55,612.23) ; C13.1@514.82,-223.64 492.11,-223.64 C84.1@479.82,-211.36 476.44,-214.74 432.07,-214.74 ; v3(527.93,152.07) U1.Y1@527.93,164.39 ; v1(126.57,-165) 126.57,-182.47 U2.G9@158.84,-214.74
  Solder Side w5: v1(94.82,-227.5) 107.58,-214.74 U3.G1@158.84,-214.74 ; C22.1@104.82,-123.64 104.82,-143.26 v1(126.57,-165) ; C21.1@104.82,-58.64 106.2,-57.26 v1@140.06,-57.26 ; C20.1@104.82,6.36 105.96,7.5 v1(139.82,7.5) 141.59,5.73 U3.P1@158.84,5.73 ; v1@126.57,-163.14 152.15,-137.56 152.72,-136.98 164.96,-136.98 165.53,-137.56 166.1,-136.98 175.57,-136.98 U3.J2@190.33,-151.75 ; C23.1@133.68,-467.5 144.82,-456.36 v1(144.82,-417.5) 144.07,-416.75 144.07,-386.99 U3.B1@158.84,-372.22 ; v1(134.82,-322.5) 145.57,-322.5 U3.D1@158.84,-309.23 ; v1(134.82,-282.5) 154.07,-282.5 U3.E1@158.84,-277.74 U3.E2@190.33,-277.74 ; v1(139.82,-57.5) v1@140.06,-57.26 ; v1(139.82,59.37) 149.49,59.37 U3.T1@158.84,68.72 ; U3.M1@158.84,-57.26 v1@140.06,-57.26 ; U3.B3@221.83,-372.22 234.82,-385.22 v1(234.82,-387.5) ; U3.E8@379.31,-277.74 U3.D8@379.31,-309.23 394.08,-324 423.32,-324 433.64,-313.68 v1(433.64,-307.5) ; U3.G8@379.31,-214.74 U3.G9@410.81,-214.74 ; U3.J8@379.31,-151.75 395.06,-167.5 429.82,-167.5 v1(434.82,-162.5) 455.96,-183.64 C87.1@464.82,-183.64 468.25,-180.22 R13.2@499.82,-180.22 499.82,-173.66 517.32,-156.16 517.32,-73.86 C25.1@510.96,-67.5 ; v1(394.82,-7.5) 397.58,-7.5 U3.P9@410.81,5.73 425.57,-9.04 425.57,-42.5 U3.M9@410.81,-57.26 ; v1(394.82,52.5) 410.81,68.48 U3.T9@410.81,68.72 ; U3.B9@410.81,-372.22 U3.A9@410.81,-403.72 413.6,-403.72 v1@427.32,-390 ; U3.F9@410.81,-246.24 U3.G9@410.81,-214.74 ; v1(429.65,-390) v1@427.32,-390 ; C24.1@469.82,-376.36 440.96,-376.36 v1@427.32,-390 ; C86.1@479.82,-248.64 465.96,-248.64 v1(454.82,-237.5) 432.07,-214.74 U3.G9@410.81,-214.74
  other v2: 3843.35,-1010 3886.65,-1010 634.57,75.32 670,75.32 705.43,75.32 634.57,114.68 670,114.68 705.43,114.68 6195.31,460.32 6234.68,460.32 6195.31,499.69 6234.68,499.69
  other v4: 4725.32,365.32 4764.68,365.32 4745,385 4725.32,404.68 4764.68,404.68
I2C_SCL: R20.1 U1.B20
I2C_SDA: R21.1 U1.D19
NetAE1_1: AE1.1 C72.2 L5.1
NetC1_2: C1.2 R34.2 U1.T19 Y1.1
NetC2_2: C2.2 U1.T20 Y1.3
NetC3_2: C3.2 U1.Y17 Y2.1
NetC4_2: C4.2 U1.W17 Y2.2
NetC6_2: C6.2 U4.3
NetC33_2: C33.2 C34.2 U1.V17 | length 18.1
  Component Side w5: U1.V17@476.75,573.84 v1(489.55,586.63)
NetC38_2: C38.2 C39.2 C40.2 C41.2 C42.2 U1.C16 U1.D16 U1.H10 U1.H11 U1.H12 U1.H13 U1.J13 U1.K13 U1.L13 | length 162.9
  Component Side w5: v1(80.1,561.04) U1.C16@92.89,548.25 ; v1(105.69,561.04) U1.D16@118.48,548.25 ; v1(208.05,381.91) U1.H10@220.85,394.7 ; v1(208.05,433.09) U1.H11@220.85,420.3 ; v1(208.05,458.68) U1.H12@220.85,445.89 ; v1(208.05,484.27) U1.H13@220.85,471.48 ; v1(233.64,484.27) U1.J13@246.44,471.48 ; v1(259.23,484.27) U1.K13@272.03,471.48 ; U1.L13@297.62,471.48 v1(310.41,484.27)
NetC47_2: C47.2 C48.2 C49.2 C50.2 C51.2 C52.2 U1.H8 U1.H9 U1.J8 U1.K8 U1.L8 U1.M8 U1.M13 U1.N8 U1.N9 U1.N10 U1.N11 U1.N12 U1.V9 | length 217.2
  Component Side w5: v1(208.05,330.73) U1.H8@220.85,343.52 ; v1(208.05,356.32) U1.H9@220.85,369.11 ; v1(233.64,330.73) U1.J8@246.44,343.52 ; U1.L8@297.62,343.52 v1(310.41,330.73) ; U1.M8@323.21,343.52 v1(336,330.73) ; U1.M13@323.21,471.48 v1(336,484.27) ; U1.N8@348.8,343.52 v1(361.59,330.73) ; U1.N9@348.8,369.11 v1(361.59,356.32) ; U1.N10@348.8,394.7 v1(361.59,381.91) ; U1.N11@348.8,420.3 v1(361.59,433.09) ; U1.N12@348.8,445.89 v1(361.59,458.68) ; U1.V9@476.75,369.11 v1(489.55,356.32)
NetC53_2: C53.2 U1.L18 | length 18.1
  Component Side w5: U1.L18@297.62,599.43 v1(310.41,612.23)
NetC58_2: C58.2 C59.2 U1.U18 | length 18.1
  Component Side w5: U1.U18@451.16,599.43 v1(463.96,612.23)
NetC60_2: C60.2 U1.T18 | length 18.1
  Component Side w5: U1.T18@425.57,599.43 v1(438.37,612.23)
NetC66_2: C66.2 R22.1 U7.2 U7.9
NetC71_2: C71.2 U8.9
NetC73_2: C73.2 L5.2 U9.41
NetC75_1: C75.1 L6.1 U9.31
NetC78_1: C78.1 U10.3 U10.9
NetC79_2: C79.2 U11.21 Y3.1
NetC80_2: C80.2 U11.22 Y3.3
NetC82_2: C82.2 U11.10
NetJP1_2: JP1.D- U11.19
NetJP1_3: JP1.D+ U11.20
NetL1_1: L1.1 U6.1
NetL2_1: L2.1 U7.4
NetL3_1: L3.1 U7.7
NetL4_1: L4.1 U8.1 U8.2 U8.3
NetL6_2: L6.2 U9.34
NetQ1_1: Q1.1 R3.2 SW1.3 SW1.4 U1.Y16
NetQ1_3: Q1.3 R2.1 U1.W16
NetR5_1: R5.1 R6.2 U4.2
NetR7_1: R7.1 U2.L8 | length 134.2
  Component Side w5: R7.1@69.82,-114.78 84.61,-100 149.19,-100 152.72,-103.53 171.07,-103.53 185.83,-88.76 U2.L8@190.33,-88.76
NetR12_2: R12.2 U1.H2 | length 18.1
  Component Side w5: v1(208.05,177.18) U1.H2@220.85,189.98
NetR13_1: R13.1 U3.L8 | length 143.7
  Solder Side w5: U3.L8@379.31,-88.76 385.08,-94.53 395.69,-94.53 404.69,-103.53 414.96,-103.53 425.57,-114.14 426.06,-114.14 441.92,-130 485.04,-130 R13.1@499.82,-144.78
NetR14_1: R14.1 U1.F12 U9.22 | length 18.1
  Component Side w5: v1(156.87,458.68) U1.F12@169.66,445.89
NetR15_1: R15.1 U1.E13 U9.24 | length 18.1
  Component Side w5: v1(131.28,484.27) U1.E13@144.07,471.48
NetR16_1: R16.1 U1.E14 U9.26 | length 18.1
  Component Side w5: v1(131.28,509.86) U1.E14@144.07,497.07
NetR17_1: R17.1 U1.F10 U9.23 | length 18.1
  Component Side w5: v1(156.87,381.91) U1.F10@169.66,394.7
NetR18_1: R18.1 U1.F11 U9.25 | length 18.1
  Component Side w5: v1(156.87,433.09) U1.F11@169.66,420.3
NetR19_1: R19.1 U1.E12 | length 18.1
  Component Side w5: v1(131.28,458.68) U1.E12@144.07,445.89
NetR19_2: R19.2 U9.20
NetR23_1: R23.1 R24.2 U8.5
NetR25_2: R25.2 U1.V5 | length 74.6
  Component Side w5: U1.V5@476.75,266.75 488.17,278.17 540.5,278.17 v3(544.82,282.5)
NetR26_2: R26.2 U10.1
NetR27_2: R27.2 U10.12
NetR28_2: R28.2 U11.24
NetR29_1: R29.1 U11.17
NetR30_1: R30.1 R31.2 U11.16
NetR32_2: R32.2 U11.14
NetR33_2: R33.2 U11.13
NetU1_A13: U1.A13 U5.5
NetU1_B13: U1.B13 U5.1
NetU1_B15: U1.B15 U5.6
NetU1_B17: U1.B17 U5.2
PWR_GOOD: SW2.2 U4.4 U7.8 U8.4
RESET: C5.2 R4.1 U1.R16 U4.6 U10.2 U11.15 | length 18.1
  Component Side w5: U1.R16@399.98,548.25 v1(412.78,561.04)
UART_RX: U1.B18 U10.10
UART_TX: U1.E16 U10.7
USB_OTG_N: U1.V19 U11.2 | length 109.3
  Component Side w5: U11.2@704.8,-114.53 713.01,-114.53 753.08,-74.46 753.08,-30
USB_OTG_P: U1.V20 U11.3 | length 96.4
  Component Side w5: U11.3@704.8,-94.84 713.01,-94.84 743.08,-64.77 743.08,-19.08
USB_UART_DM: R26.1 U11.4 | length 73
  Component Side w5: U11.4@704.8,-75.16 713.01,-75.16 734.08,-54.09 734.08,-19.08
USB_UART_DP: R27.1 U11.5 | length 43.6
  Component Side w5: U11.5@704.8,-55.47 713.01,-55.47 725.08,-43.4 725.08,-25.08
VBAT: C61.2 C64.2 C67.2 C68.2 U6.4 U6.5 U7.3 U7.6 U8.10 U8.11 U8.12
VUSB: C32.2 C77.1 JP1.VBUS R30.2 U1.W20 U10.4
pads on no net: AE1.2 AE1.3 AE1.4 Designator11.1 Designator11.2 Designator11.3 Designator11.4 Designator11.5 Designator11.6 Designator11.7 Designator11.8 Designator11.9 Designator11.10 Designator11.11 Designator11.12 Designator11.13 Designator11.14 Designator11.15 Designator11.16 Designator11.17 Designator11.18 Designator11.19 Designator11.20 Designator11.21 Designator11.22 Designator11.23 Designator11.24 Designator11.25 JP1.ID SW2.1 SW2.4 U1.A5 U1.A6 U1.A8 U1.A14 U1.A15 U1.A16 U1.A17 U1.A18 U1.A19 U1.B5 U1.B6 U1.B7 U1.B14 U1.B16 U1.B19 U1.C6 U1.C7 U1.C8 U1.C9 U1.C10 U1.C13 U1.C14 U1.C15 U1.C17 U1.C19 U1.C20 U1.D5 U1.D13 U1.D14 U1.D17 U1.D18 U1.D20 U1.E5 U1.E6 U1.E7 U1.E9 U1.E10 U1.E15 U1.E17 U1.E18 U1.E19 U1.E20 U1.F7 U1.F9 U1.F16 U1.F18 U1.F19 U1.F20 U1.G16 U1.G17 U1.G20 U1.H16 U1.H19 U1.J5 U1.J15 U1.J16 U1.J18 U1.K2 U1.K15 U1.K16 U1.K17 U1.K18 U1.K19 U1.K20 U1.L15 U1.L16 U1.L17 U1.L19 U1.M18 U1.M19 U1.N14 U1.N15 U1.N16 U1.N20 U1.P13 U1.P14 U1.P15 U1.P16 U1.P19 U1.P20 U1.R7 U1.R8 U1.R9 U1.R10 U1.R11 U1.R14 U1.R15 U1.T5 U1.T6 U1.T7 U1.T8 U1.T10 U1.T11 U1.T13 U1.T14 U1.T15 U1.T17 U1.U5 U1.U7 U1.U8 U1.U10 U1.U11 U1.U13 U1.U14 U1.U16 U1.U17 U1.V6 U1.V7 U1.V8 U1.V10 U1.V11 U1.V12 U1.V16 U1.W5 U1.W6 U1.W7 U1.W8 U1.W9 U1.W10 U1.W11 U1.W12 U1.W13 U1.W14 U1.W15 U1.W19 U1.Y5 U1.Y6 U1.Y7 U1.Y8 U1.Y9 U1.Y10 U1.Y11 U1.Y12 U1.Y13 U1.Y14 U1.Y19 U2.J1 U2.J9 U2.L1 U2.L9 U2.M7 U3.J1 U3.J9 U3.L1 U3.L9 U3.M7 U4.7@3847.28,-1010 U4.7@3882.72,-1010 U5.3 U5.7 U6.7@7240,477.28 U6.7@7240,512.72 U8.17@4745,385 U9.2 U9.3 U9.4 U9.5 U9.6 U9.7 U9.8 U9.9 U9.10 U9.11 U9.13 U9.15 U9.16 U9.17 U9.18 U9.27 U9.28 U9.38 U9.39 U10.6 U10.8 U10.11 U11.6 U11.7 U11.8 U11.11 U11.12 U11.23

## Polygon pours and split planes (outlines as drawn)
GND on Ground Plane (GND) (split plane): 613 vertices, not listed, extent -887.54,-1029.93 887.54,1054.9
1V4 on Power Plane (VCC) (split plane): 613 vertices, not listed, extent -887.54,-1029.93 887.54,1054.9

## Keep-outs
Keep-Out Layer:
  circle w0.5: c751.3,751.3 r93.75
  circle w0.5: c-751.3,-751.3 r93.75
  circle w0.5: c751.3,-751.3 r93.75
  circle w0.5: c-751.3,751.3 r93.75
  lines w0.5: -868.83,-648.34 ccw(c-751.3,-751.3) -671.09,-885.39 cw(c0,-2007.32) -287.49,-732 cw(c-260,-853.94) -135,-853.94 -135,-1025 ccw(c-110,-1025) -110,-1050 110,-1050 ccw(c110,-1025) 135,-1025 135,-853.94 cw(c260,-853.94) 287.49,-732 cw(c0,-2007.32) 671.09,-885.39 ccw(c751.3,-751.3) 868.83,-648.34 cw(c1608.88,0) 654.03,-237.23 cw(c683.14,-230) 683.14,-200 725,-200 ccw(c725,-160) 765,-160 765,160 ccw(c725,160) 725,200 683.14,200 cw(c683.14,230) 654.03,237.23 cw(c1608.88,0) 868.83,648.34 ccw(c751.3,751.3) 671.09,885.39 cw(c0,2007.32) 593.05,842.25 cw(c525,975.93) 375,975.93 375,1075 325,1075 325,1033 cw(c305,1033) 305,1013 -305,1013 cw(c-305,1033) -325,1033 -325,1075 -375,1075 -375,975.93 cw(c-525,975.93) -593.05,842.25 cw(c0,2007.32) -671.09,885.39 ccw(c-751.3,751.3) -868.83,648.34 cw(c-1608.88,0) -654.03,237.23 cw(c-683.14,230) -683.14,200 -725,200 ccw(c-725,160) -765,160 -765,-160 ccw(c-725,-160) -725,-200 -683.14,-200 cw(c-683.14,-230) -654.03,-237.23 cw(c-1608.88,0) -868.83,-648.34